# Altium PCB PCB1.PcbDoc
Units mm, origin at the board's own origin, x right, y up, seen from the top; angles counter-clockwise.
Board outline 97.66 x 74.3 mm, 4 copper layers (Top Layer, Layer 1, Layer 2, Bottom Layer), stack 0.603 mm thick; 32 components, 47 nets, 113 pads, 14 vias.
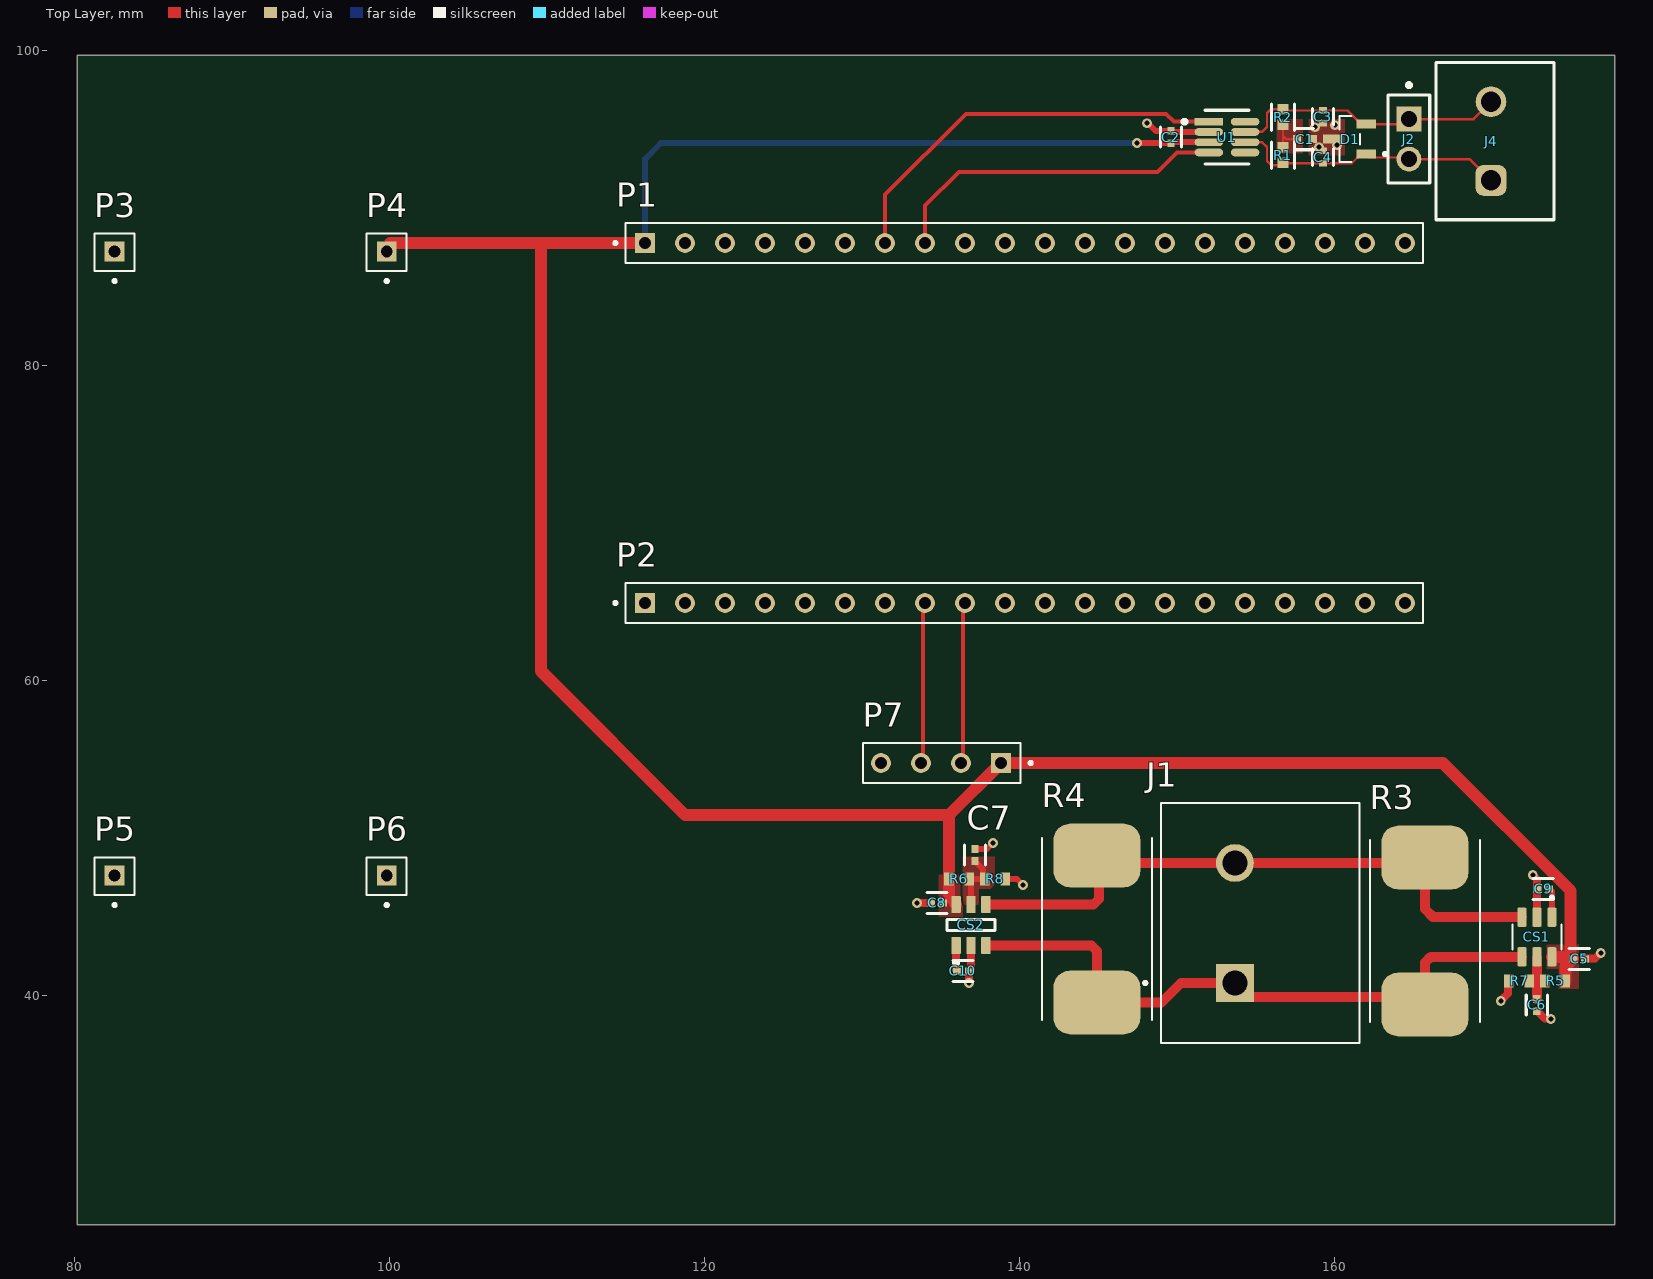
[diagram p0: Top Layer view]
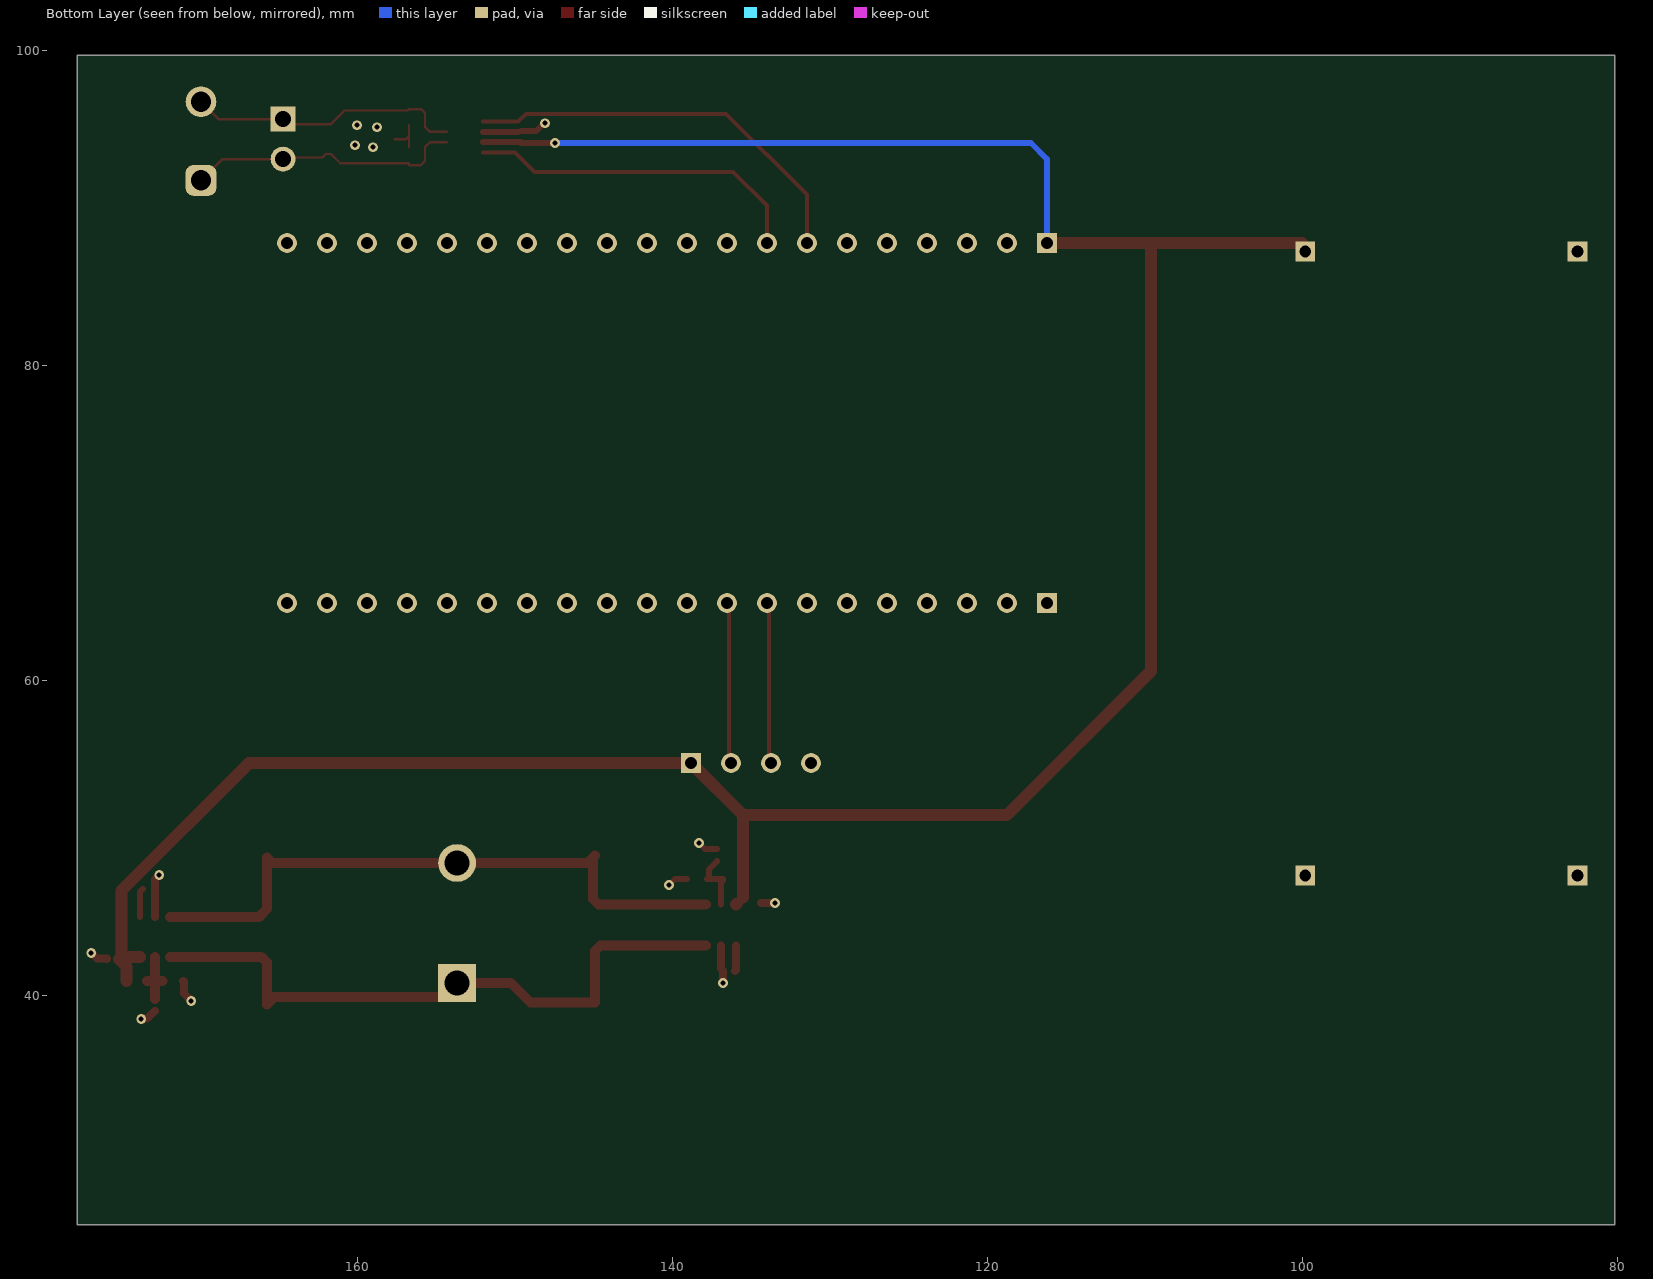
[diagram p1: Bottom Layer view, seen from below]
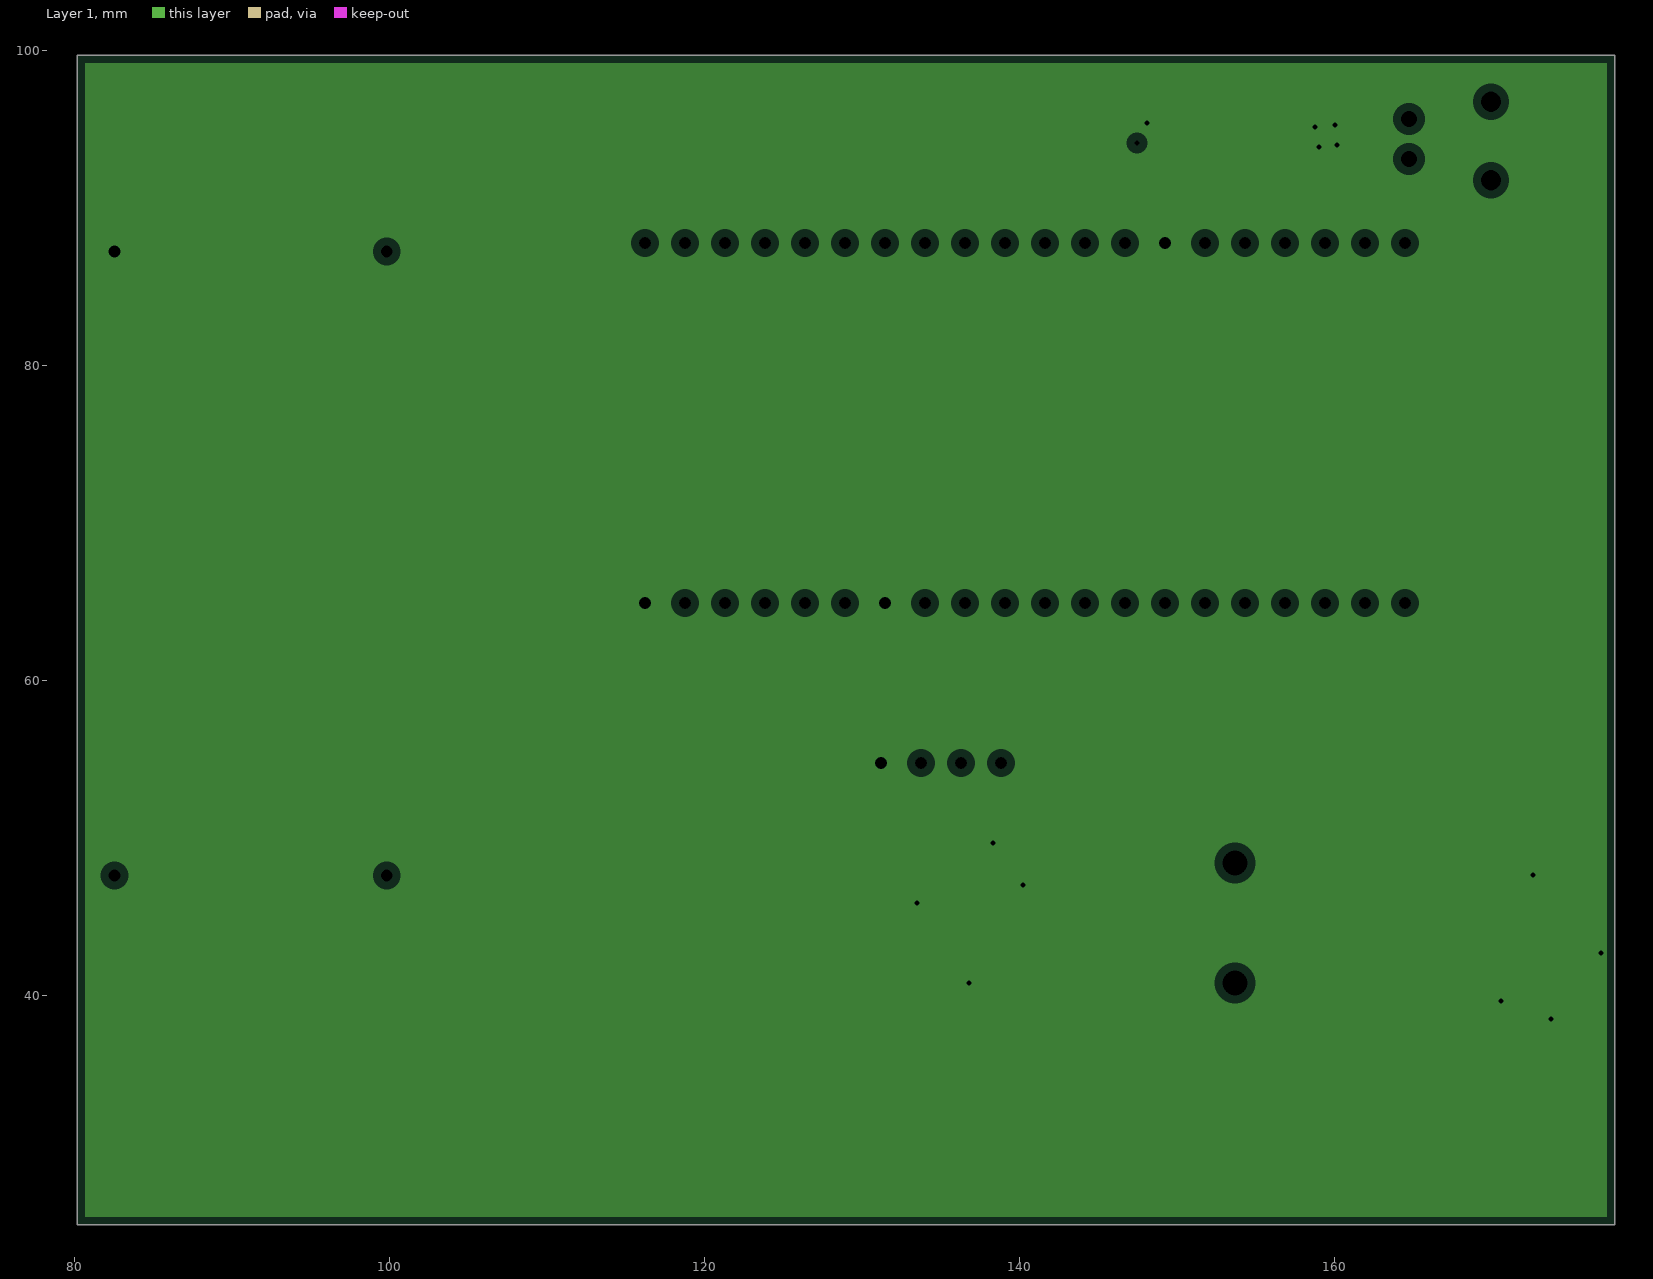
[diagram p2: Layer 1, clearances drawn from the general rule]
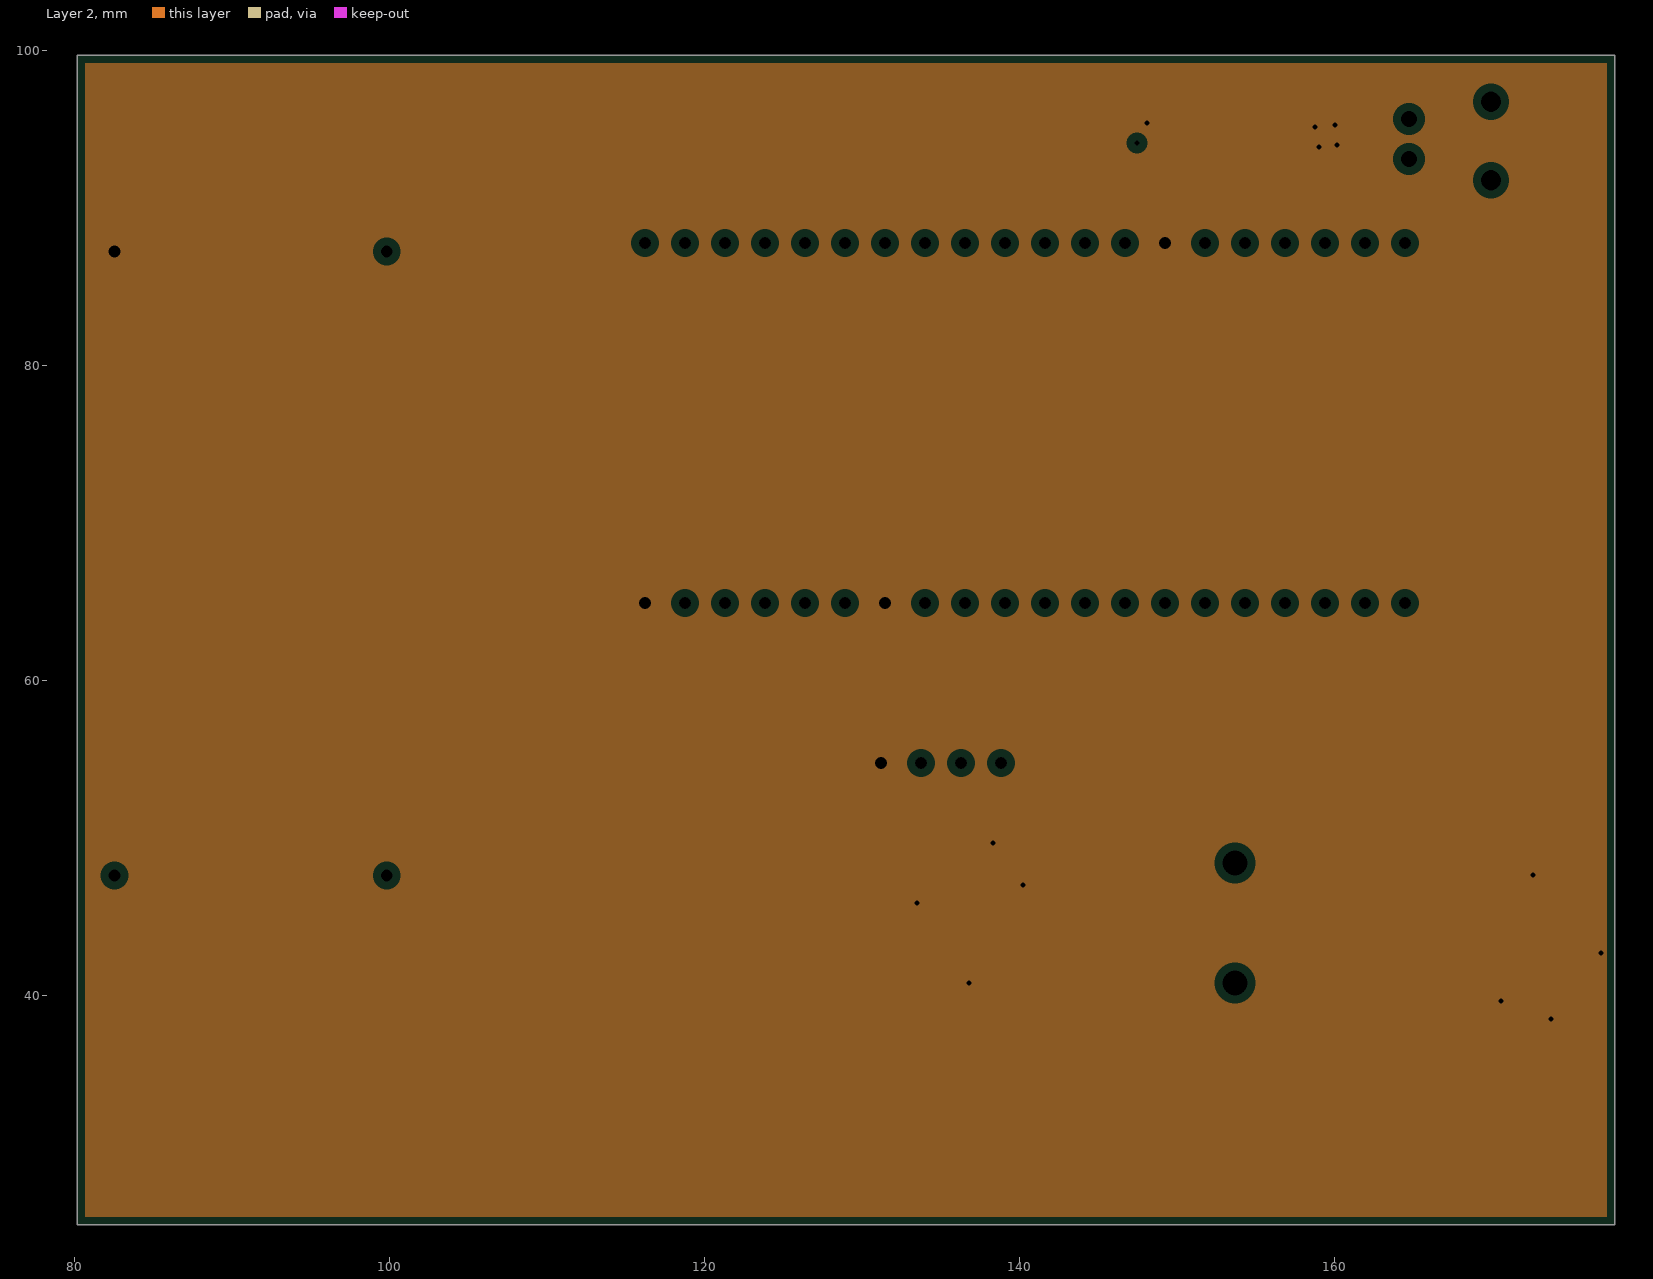
[diagram p3: Layer 2, clearances drawn from the general rule]
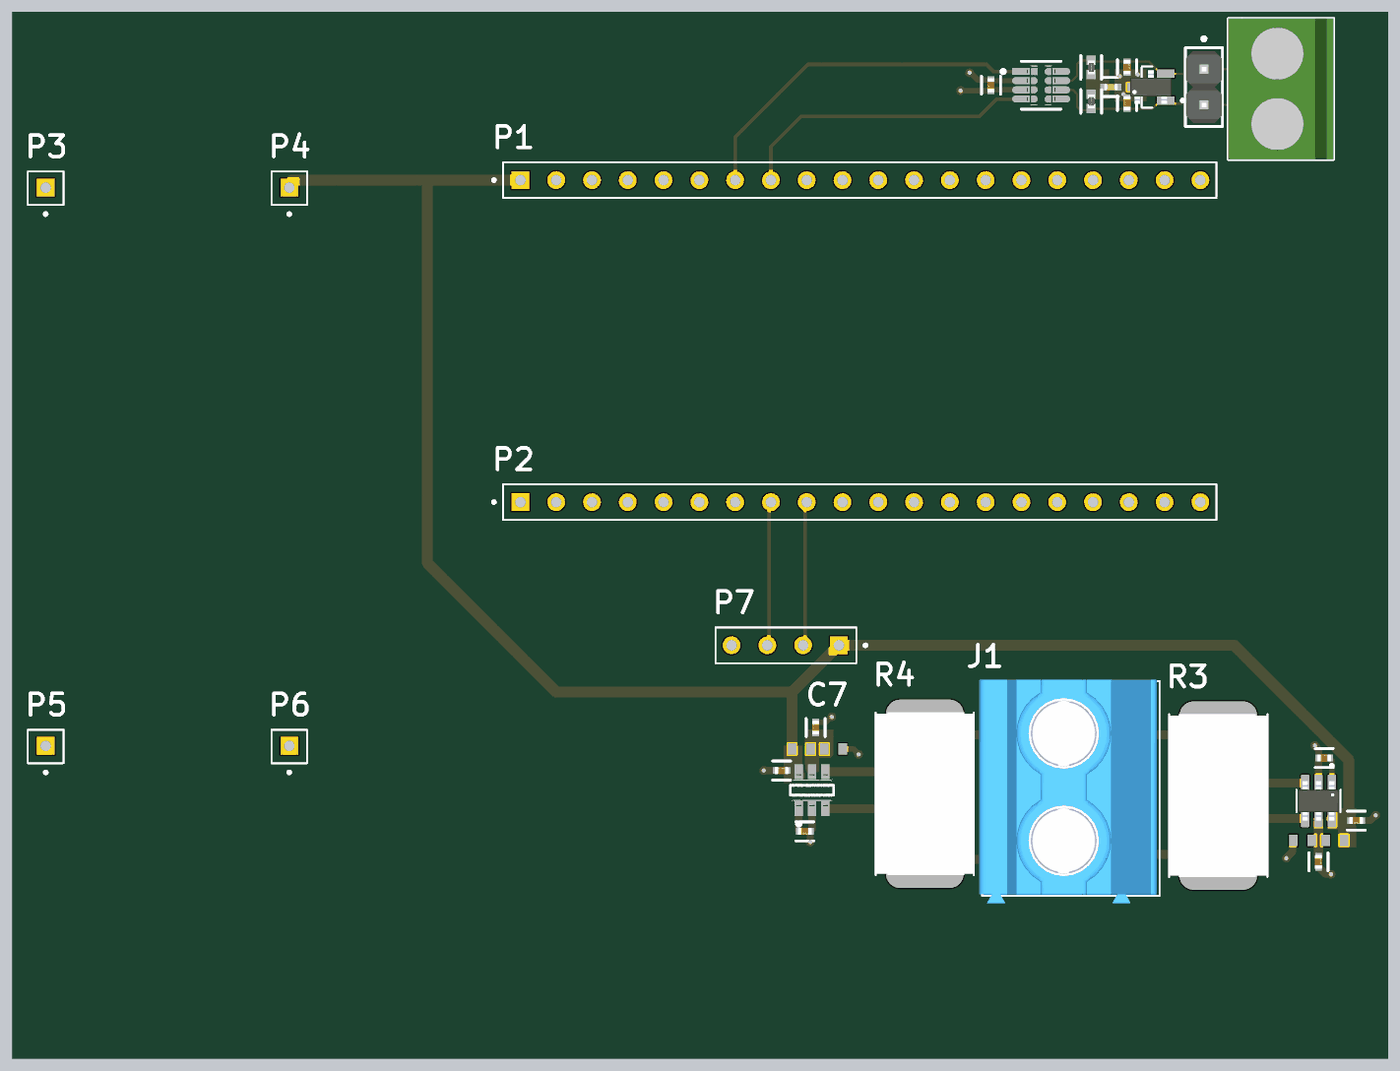
[diagram p4: 3D render of the assembled board from above, using the file's embedded part models]

## Layer stack, top to bottom
Top Solder: solder mask 0.0102, Solder Resist, Dk 3.5
Top Layer: signal copper 0.0356
Dielectric 2: prepreg 0.0711, PP-006, Dk 4.1
Layer 1: plane copper 0.035, net GND
Dielectric 1: dielectric 0.32, FR-4, Dk 4.8
Layer 2: plane copper 0.035, net GND
Dielectric 3: prepreg 0.0711, PP-006, Dk 4.1
Bottom Layer: signal copper 0.0356
Bottom Solder: solder mask 0.0102, Solder Resist, Dk 3.5

## Board outline
80.137,25.4 177.8,25.4 177.8,99.695 80.137,99.695

## Design rules (kind name [scope] priority, off if disabled: settings)
Clearance [All] p1: gap=0.152 ignorepadtopadclearanceinfootprint=FALSE
DiffPairsRouting [All] p1: maxlimit=0.254 minlimit=0.254 mostfreqgap=0.254 toplayer_minwidth=0.127 toplayer_maxwidth=0.381 toplayer_prefwidth=0.381 bottomlayer_minwidth=0.381 bottomlayer_maxwidth=0.381 bottomlayer_prefwidth=0.381 maxuncoupledlength=12.7
PlaneClearance [All] p1: clearance=0.508
PlaneConnect [All] p1: planeconnectstyle=Relief reliefexpansion=0.508 reliefentries=4 reliefconductorwidth=0.254 reliefairgap=0.254
PolygonConnect [All] p1: connectstyle=Direct reliefconductorwidth=0.254 reliefentries=4 polygonreliefangle="90 Angle" airgapwidth=0.254
RoutingVias [All] p1: holewidth=0.305 width=0.61 viastyle="Through Hole" minholewidth=0.305 minwidth=0.61 maxholewidth=0.305 maxwidth=0.61
SolderMaskExpansion [All] p1: expansion=0.102 istentingtop=FALSE
SupplyNets "Schematic Supply Nets_4" [InNet('GND')] p1: voltage=0.000
SupplyNets "Schematic Supply Nets_3" [InNet('3V3')] p2: voltage=0.000
SupplyNets "Schematic Supply Nets_2" [InNet('+5')] p3: voltage=0.000
SupplyNets "Schematic Supply Nets_1" [InNet('-VIN')] p4: voltage=0.000
SupplyNets "Schematic Supply Nets" [InNet('VIN')] p5: voltage=0.000
Width [All] p1: maxlimit=1.27 minlimit=0.152 preferedwidth=0.254
27 further rules are at their usual default settings.

## Classes and differential pairs
differential pair class CAN: CAN
component class Sheet_1: C5 C6 C7 C8 C9 C10 CS1 CS2 J1 P1 P2 P3 P4 P5 P6 P7 R3 R4 R5 R6 R7 R8
component class CAN: C1 C2 C3 C4 D1 J2 J4 R1 R2 U1
differential pair CAN: +CAN_P -CAN_N

## Components (designator, comment, footprint, x,y, rotation, side; value= is the part's Value field where it differs from the comment)
C1 "CC0402KRX7R6BB472" FP-CC0402-MFG 158.115,94.361 r180 top value="4.7 nF"
C2 "CL05B104KP5NNNC" FP-CL17-IPC_C 149.606,94.488 r270 top
C3 "CL05C101JB5NNNC" FP-CL05-MFG 159.258,95.774 r90 top value=100pF
C4 "CL05C101JB5NNNC" FP-CL05-MFG 159.258,93.218 r270 top value=100pF
C5 "CL05A104KA5NNNC" FP-CL278-IPC_C 175.529,42.291 r0 top
C6 "CL05A104KA5NNNC" FP-CL278-IPC_C 172.847,39.37 r90 top
C7 "CL05A104KA5NNNC" FP-CL278-IPC_C 137.16,48.895 r270 top
C8 "CL05A104KA5NNNC" FP-CL278-IPC_C 134.747,45.847 r180 top
C9 "CL05A104KA5NNNC" FP-CL278-IPC_C 173.243,46.736 r180 top
C10 "CL05A104KA5NNNC" FP-CL278-IPC_C 136.398,41.529 r0 top
CS1 "INA181A3IDBVR" SOT95P280X145-6N 172.847,43.688 r270 top
CS2 "INA181A1IDBVR" FP-DBV0006A-MFG 136.906,44.45 r90 top
D1 "ESD2CAN24DBZRQ1" SOT95P237X112-3N 160.948,94.361 r180 top
J1 "TB005-762-02BE" CUI_TB005-762-02BE 153.67,40.767 r90 top
J2 "M20-9990246" FP-M20-9990246-MFG 164.719,94.361 r270 top
J4 "691137710002" 691137710002 170.18,94.234 r90 top
P1 "Header-Female-2.54_1x20" AMPHENOL_76341-322LF 142.875,87.757 r180 top
P2 "Header-Female-2.54_1x20" AMPHENOL_76341-322LF 142.875,64.897 r180 top
P3 "Header-Male-2.54_1x1" PCBCOMPONENT_1 82.517,87.225 r270 top
P4 "Header-Male-2.54_1x1" PCBCOMPONENT_1 99.803,87.225 r270 top
P5 "Header-Male-2.54_1x1" PCBCOMPONENT_1 82.517,47.595 r270 top
P6 "Header-Male-2.54_1x1" PCBCOMPONENT_1 99.803,47.595 r270 top
P7 "Header-Female-2.54_1x4" "4 PIN CONNECTOR MALE" 115.951,50.8 r0 top
R1 "ERJ-2RKF60R4X" FP-ERJ2RK-IPC_A 156.718,93.345 r90 top
R2 "ERJ-2RKF60R4X" FP-ERJ2RK-IPC_A 156.718,95.758 r270 top
R3 "WSR32L000FEA" RESM11569X253N 165.735,44.069 r270 top value=2mR
R4 "WSR32L000FEA" RESM11569X253N 144.907,44.196 r90 top value=2mR
R5 "RC0603FR-1010KL" RESC1608X55X25LL10T15 174.005,40.894 r0 top
R6 "RC0603FR-1010KL" RESC1608X55X25LL10T15 136.144,47.371 r180 top
R7 "RC0603FR-1010KL" RESC1608X55X25LL10T15 171.719,40.894 r0 top
R8 "RC0603FR-1010KL" RESC1608X55X25LL10T15 138.43,47.371 r180 top
U1 "TCAN332GDCNR" FP-DCN0008A-IPC_A 153.162,94.488 r0 top

## Footprints (in the part's own frame and the unit in brackets; to place one, negate y for a bottom-side part, rotate by r counter-clockwise, add the part's x,y. Pads: shape width x height; smd on the part's side, far side on the other; paste and mask are expansions set on the pad)
"4 PIN CONNECTOR MALE" [mm]
  rect 1.258x1.258 / inner round 1.258 / far side rect 1.258x1.258 hole 0.75: 1(22.86,3.937)
  round 1.258 hole 0.75: 2(20.32,3.937) 3(17.78,3.937) 4(15.24,3.937)
  silkscreen extent 14.1,2.67 24.84,5.21
691137710002 [mm] "Horizontal Cable Entry with Pressure Clamp, pitch 5mm, 02p"
  rrect50% 1.95x1.95 hole 1.3: 1(-2.5,0.25)
  round 1.95 hole 1.3: 2(2.5,0.25)
  silkscreen extent -5,-3.75 5,3.75, body extent -5,-3.75 5,3.75, height 11.6
AMPHENOL_76341-322LF [mm]
  rect 1.258x1.258 / inner round 1.258 / far side rect 1.258x1.258 hole 0.75: 01(26.67,0)
  round 1.258 hole 0.75: 02(24.13,0) 03(21.59,0) 04(19.05,0) 05(16.51,0) 06(13.97,0) 07(11.43,0) 08(8.89,0) 09(6.35,0) 10(3.81,0) 11(1.27,0) 12(-1.27,0) 13(-3.81,0) 14(-6.35,0) 15(-8.89,0) 16(-11.43,0) 17(-13.97,0) 18(-16.51,0) 19(-19.05,0) 20(-21.59,0)
  silkscreen extent -22.73,-1.27 28.65,1.27
CUI_TB005-762-02BE [mm]
  rect 2.4x2.4 / inner round 2.4 / far side rect 2.4x2.4 hole 1.6: 1(0,0)
  round 2.4 hole 1.6: 2(7.62,0)
  silkscreen extent -3.81,-7.9 11.43,5.8, body extent -4.32,-7.7 11.52,4.9, height 21.7
FP-CC0402-MFG [mm]
  rect 0.5x0.5 smd paste+0 mask+0: 1(-0.5,0) 2(0.5,0)
  silkscreen extent -0.53,-0.68 0.53,0.67, body extent -0.87,-0.48 0.87,0.48, height 0.25
FP-CL05-MFG [mm]
  rect 0.42x0.525 smd paste+0 mask+0: 1(-0.397,0) 2(0.397,0)
  silkscreen extent -0.53,-0.67 0.53,0.67, body extent -0.71,-0.38 0.71,0.38, height 0.25
FP-CL17-IPC_C [mm]
  rect 0.515x0.472 smd paste+0 mask+0: 1(-0.379,0) 2(0.379,0)
  silkscreen extent -0.64,-0.67 0.64,0.67, body extent -0.74,-0.38 0.74,0.38, height 0.25
FP-CL278-IPC_C [mm]
  rect 0.515x0.472 smd paste+0 mask+0: 1(-0.379,0) 2(0.379,0)
  silkscreen extent -0.64,-0.67 0.64,0.67, body extent -0.74,-0.38 0.74,0.38, height 0.25
FP-DBV0006A-MFG [mm]
  rrect17% 1.1x0.6 smd paste+0 mask+0: 1(-1.3,0.95) 2(-1.3,0) 3(-1.3,-0.95) 4(1.3,-0.95) 5(1.3,0) 6(1.3,0.95)
  silkscreen extent -2.52,-1.53 0.35,1.53, body extent -1.95,-1.78 1.95,1.78, height 0.25
FP-DCN0008A-IPC_A [mm]
  rect 1.805x0.495 smd paste+0 mask+0: 1(-1.15,0.975)
  rrect100% 1.805x0.495 smd paste+0 mask+0: 2(-1.15,0.325) 3(-1.15,-0.325) 4(-1.15,-0.975) 5(1.15,-0.975) 6(1.15,-0.325) 7(1.15,0.325) 8(1.15,0.975)
  silkscreen extent -2.82,-1.7 1.4,1.7, body extent -2.55,-1.95 2.55,1.95, height 0.25
FP-ERJ2RK-IPC_A [mm]
  rect 0.668x0.672 smd paste+0 mask+0: 1(-0.502,0) 2(0.502,0)
  silkscreen extent -0.84,-0.74 0.84,0.74, body extent -1.04,-0.54 1.04,0.54, height 0.25
FP-M20-9990246-MFG [mm]
  rect 1.57x1.57 hole 1.02 paste-2539.97 mask+0: 1(-1.27,0)
  round 1.57 hole 1.02 paste-2539.97 mask+0: 2(1.27,0)
  silkscreen extent -3.55,-1.32 2.79,1.32, body extent -2.89,-1.42 2.89,1.42, height 0.25
PCBCOMPONENT_1 [mm]
  rect 1.258x1.258 / inner round 1.258 / far side rect 1.258x1.258 hole 0.75: 1(0,0)
  silkscreen extent -1.14,-1.27 1.98,1.27
RESC1608X55X25LL10T15 [mm] "Chip Resistor, 2-Leads, Body 1.60x0.80mm, IPC High Density"
  rect 0.6x0.8 smd: 1(-0.65,0) 2(0.65,0)
  body extent -0.85,-0.45 0.85,0.45, height 0.55
RESM11569X253N [mm]
  rrect50% 4.04x5.51 smd: 1(-4.665,0) 2(4.665,0)
  silkscreen extent -5.78,-3.49 5.78,3.49, body extent -5.78,-3.56 5.78,3.42, height 2.42
SOT95P237X112-3N [mm]
  rect 1.24x0.59 smd: 1(-1.055,0.95) 2(-1.055,-0.95) 3(1.055,0)
  silkscreen extent -2.35,-1.46 0.65,1.46, body extent -1.18,-1.46 1.18,1.46, height 1.12
SOT95P280X145-6N [mm]
  rrect25% 1.21x0.58 smd: 1(-1.255,0.95) 2(-1.255,0) 3(-1.255,-0.95) 4(1.255,-0.95) 5(1.255,0) 6(1.255,0.95)
  silkscreen extent -2.6,-1.56 0.8,1.56, body extent -1.4,-1.45 1.4,1.45, height 1.45

## Part data
C1: library part CMP-03422-001343-1, "CC0402 4.7 nF X7R 10.00% 10 V", Capacitance="4.7 nF", Manufacturer=YAGEO, Package=CC0402, Temperature="-55°C to +125°C", Temperature Characteristic=X7R, Temperature Coefficient=30ppm/°C, Temperature Range High=+125°C, Temperature Range Low=-55°C, Tolerance=0.1, Voltage Rating="10 V", Automotive=No, Automotive Grade=NA, Category=Cap, ComponentLink2Description=Datasheet, ComponentLink2URL=http://www.yageo.com/documents/recent/UPY-GP_NP0_16V-to-50V_16.pdf, Device Class L1="Passive Components", Device Class L2=Capacitors, Device Class L3="Ceramic Capacitors", Footprint Url=http://www.yageo.com/exep/pages/download/literatures/UPY-C_GEN_24.pdf, Height=0.55mm, Ipc Land Pattern Name=CAPC10050X50, Lead Free=Yes, Manufacturer Part Number=CC0402KRX7R6BB472, Material=Ceramic, Mouser Description="Cap Ceramic 0.0047uF 10V X7R 10% SMD 0402 125°C Paper T/R", Octopart=https://octopart.com/cc0402krx7r6bb472-yageo-90326733, RoHS=TRUE
C2: library part CMP-13271-001069-1, "Cap Ceramic 100nF 10V X7R ±10% SMD 0402 +125°C Paper T/R", Capacitance=100nF, Case Code (Imperial)=0402, Case Code (Metric)=1005, Dielectric=X7R, Max Operating Temperature=125°C, Min Operating Temperature=-55°C, Package Quantity=1, Tolerance=10%, Voltage Rating=10V, Case/Package=0402, Contact Plating=Tin, Depth=0.5mm, Height=0.5mm, Length=1mm, Mount="Surface Mount", Packaging="Tape and Reel", Radiation Hardening=No, Thickness=0.022inch, Width=0.02inch
C3 C4: library part CMP-13271-000010-1, "CAP CER 100PF 50V C0G/NP0 0402", Capacitance=100pF, Manufacturer=Samsung, Package=CL05, Temperature="-55°C to +125°C", Temperature Characteristic=C0G, Temperature Coefficient=30ppm/°C, Temperature Range High=+125°C, Temperature Range Low=-55°C, Tolerance=5%, Voltage Rating=50V, Automotive=No, Category=Cap, ComponentLink2Description=Datasheet, ComponentLink2URL=http://www.samsungsem.com/global/front/downloadcms.do?path=%2F%2Fglobal%2F%2Fsupport%2F%2Fproduct-search%2F%2Fmlcc%2F%2F__icsFiles%2F%2Fafieldfile%2F%2F2019%2F%2F06%2F%2F18&fileName=CL05C101JB5NNNC-19.pdf, Device Class L1="Passive Components", Device Class L2=Capacitors, Device Class L3="Ceramic Capacitors", Digikey Description="CAP CER 100PF 50V C0G/NP0 0402", Height=0.55mm, Ipc Land Pattern Name=CAPC10050X50, Lead Free=Yes, Manufacturer Part Number=CL05C101JB5NNNC, Material=Ceramic, Octopart=https://octopart.com/cl05c101jb5nnnc-samsung-9299367, RoHS=TRUE
C5 C6 C7 C8 C9 C10: library part CMP-13271-000728-1, "Cap Ceramic 100nF 25V X5R ±10% SMD 0402 +85°C Paper T/R", Capacitance=100nF, Case Code (Imperial)=0402, Case Code (Metric)=1005, Dielectric=X5R, Max Operating Temperature=85°C, Min Operating Temperature=-55°C, Package Quantity=1, Tolerance=10%, Voltage=25V, Case/Package=0402, Depth=0.5mm, Height=0.5mm, Lead Free="Lead Free", Length=1mm, Mount="Surface Mount", Packaging="Tape and Reel", Radiation Hardening=No, Thickness=0.022inch, Voltage Rating=25V, Voltage Rating (DC)=25V, Width=0.02inch
CS1: "Operational Amplifier, 1 Func, 500uV Offset-Max, PDSO6", Average Bias Current-Max (IIB)=75uA, Case/Package=SOP, Input Offset Voltage-Max=500uV, Manufacturer="Texas Instruments", Max Operating Temperature=125°C, Min Operating Temperature=-40°C, Nominal Supply Voltage=5V, Package Body Material=Plastic, Package Shape=Rectangular, Package Style="SMALL OUTLINEMeter", Peak Reflow Temperature (Cel)=260°C, Supplier Part Number=296-47658-1-ND, Supply Voltage Limit-Max=5.5V, Temperature Grade=AUTOMOTIVE, Amplifier Type="OPERATIONAL AMPLIFIER", Category="Amplifiers - Op Amps, Buffer, Instrumentation", Channels=1, Common-mode Reject Ratio-Nom=100dB, ComponentLink1Description=https://www.ti.com:443/lit/ds/symlink/ina181.pdf?src-supplier=IHS+Markit, ComponentLink1URL=https://www.ti.com:443/lit/ds/symlink/ina181.pdf?src-supplier=IHS+Markit, ComponentLink2Description=http://www.ti.com/lit/ds/symlink/ina181.pdf?src-supplier=Digikey, ComponentLink2URL=http://www.ti.com/lit/ds/symlink/ina181.pdf?src-supplier=Digikey, JESD-30 Code=R-PDSO-G6, JESD-609 Code=e3, Manufacturer Part Number=INA181A3IDBVR, Moisture Sensitivity Level=1, Pins=6, Pricing="1=0.43, 10=0.297, 25=0.2652, 100=0.2296, 250=0.21268, 500=0.20246, 1000=0.19404 (USD)", Reach SVHC Compliant=Yes, RoHS=Yes, RoHS Compliant=Yes, Slew Rate=2V/µs, Stock=8886, Supplier=Digikey, Surface Mount=Yes, Terminal Finish=Tin, Terminal Form="Gull Wing", Terminal Position=DUAL, Unity Gain BW-Nom=350kHz
CS2: library part CMP-04895-000055-1, "IC CURR SENSE 1 CIRCUIT SOT23-6", Ambient Temperature Range High=+125°C, Ambient Temperature Range Low=-40°C, Input Bias Current=75uA, Input Offset Voltage=0.1mV, Manufacturer="Texas Instruments", Max Junction Temp=+150°C, Max Supply Voltage=5.5V, Min Supply Voltage=2.7V, Nominal Supply Current=195uA, Output Current Per Channel=8mA, Package=DBV0006A, Temperature="-40°C to +125°C", Voltage Gain=0.02V/mV, Automotive=No, Bandwidth=350kHz, Category=IC, ComponentLink2Description=Datasheet, ComponentLink2URL=http://www.ti.com/lit/ds/symlink/ina181.pdf, Device Class L1="Integrated Circuits (ICs)", Device Class L2="Linear ICs", Device Class L3=Instrumentation, Digikey Description="IC CURR SENSE 1 CIRCUIT SOT23-6", Height=1.45mm, Lead Free=Yes, Manufacturer Part Number=INA181A1IDBVR, Mouser Description="26V bi-directional current sense amplifier for cost-sensitive systems 6-SOT-23 -40 to 125", Number of Channels=1, Octopart=https://octopart.com/ina181a1idbvr-texas+instruments-81856289, RoHS=TRUE, Standoff Height=0mm, Temperature Range High=+125°C, Temperature Range Low=-40°C
D1: "Automotive, dual, 3-pF, ±24-V, ±30-kV ESD protection diode for CAN and in-vehicle networks 3-SOT-23 -55 to 150", Manufacturer="Texas Instruments", Supplier Part Number=296-ESD2CAN24DBZRQ1CT-ND, Category="Integrated Circuits (ICs)", Manufacturer Part Number=ESD2CAN24DBZRQ1, Pricing="1=0.22, 10=0.149, 25=0.1316, 100=0.1125, 250=0.10328, 500=0.09774, 1000=0.09319 (USD)", RoHS=No, Stock=12405, Supplier=Digikey
J1: "Barrier Strip Terminal Block", Manufacturer="Same Sky", Supplier Part Number=102-6189-ND, Category="Terminal Blocks", ComponentLink1Description=https://www.cuidevices.com/product/resource/digikeypdf/tb005-762.pdf?src-supplier=Digikey, ComponentLink1URL=https://www.cuidevices.com/product/resource/digikeypdf/tb005-762.pdf?src-supplier=Digikey, ComponentLink2Description=https://datasheet.octopart.com/TB005-762-02BE-Same-Sky-datasheet-182050252.pdf?src-supplier=Future+Electronics, ComponentLink2URL=https://datasheet.octopart.com/TB005-762-02BE-Same-Sky-datasheet-182050252.pdf?src-supplier=Future+Electronics, ComponentLink3Description=https://datasheet.octopart.com/TB005-762-02BE-CUI-Devices-datasheet-142371921.pdf?src-supplier=Future+Electronics, ComponentLink3URL=https://datasheet.octopart.com/TB005-762-02BE-CUI-Devices-datasheet-142371921.pdf?src-supplier=Future+Electronics, ComponentLink4Description=https://datasheet.octopart.com/TB005-762-02BE-Same-Sky-datasheet-182881445.pdf?src-supplier=Electro+Sonic, ComponentLink4URL=https://datasheet.octopart.com/TB005-762-02BE-Same-Sky-datasheet-182881445.pdf?src-supplier=Electro+Sonic, ComponentLink5Description=https://datasheet.octopart.com/TB005-762-02BE-Same-Sky-datasheet-189105715.pdf?src-supplier=Master+Electronics, ComponentLink5URL=https://datasheet.octopart.com/TB005-762-02BE-Same-Sky-datasheet-189105715.pdf?src-supplier=Master+Electronics, Manufacturer Part Number=TB005-762-02BE, Pricing="1=0.78, 10=0.574, 25=0.5, 50=0.4504, 100=0.4073, 250=0.36028, 600=0.3253, 1200=0.30358, 5400=0.27068 (USD)", RoHS=Yes, Stock=4809, Supplier=Digikey
J2: library part CMP-15831-000009-1, "CONN HEADER VERT 2POS 2.54MM", Current Rating=3A, Manufacturer=Harwin, Temperature="-40°C to +105°C", Temperature Range High=+105°C, Temperature Range Low=-40°C, Automotive=No, Category=Conn, ComponentLink2Description=Datasheet, ComponentLink2URL=https://cdn.harwin.com/pdfs/M20-999.pdf, Conn Gender=Male, Conn Orientation=Vertical, Contact Material=Tin,Nickel, Device Class L1=Connectors, Device Class L2="Headers and Wire Housings", Device Class L3=unset, Digikey Description="CONN HEADER VERT 2POS 2.54MM", Height=8.99mm, Lead Free=Yes, Manufacturer Part Number=M20-9990246, Mouser Description="2.54mm (0.1\") Pitch SIL Vertical PC Tail Pin Header, 6.1mm mating pin height, tin, 2 contacts", Number of Contacts=2, Number of Rows=1, Octopart=https://octopart.com/m20-9990246-harwin-2590635, Package=M20-9990246, Pitch=2.54mm, RoHS=TRUE
J4: library part CMP-1502-03324-2, Current Rating=16A, Max Operating Temperature=120°C, Min Operating Temperature=-30°C, Voltage Rating=300V, Contact Material="Nickel, Tin", Height=11.6mm, Lead Pitch=5mm, NexarPartId=78871135, Number of Contacts=2, Number of Pins=2, Number of Rows=1, Packaging=Box, RoHS=Non-Compliant
P1 P2: JLCPCB Part Class="Extended Part", Manufacturer=BOOMELE(博穆精密), Manufacturer Part=2.54-1*20P母, spicePre=P, spiceSymbolName=Header-Female-2.54_1x20, Supplier=LCSC, Supplier Part=C50984
P3 P4 P5 P6: JLCPCB Part Class="Extended Part", Manufacturer=BOOMELE(博穆精密), Manufacturer Part=2.54-1*1P针, spicePre=P, spiceSymbolName=Header-Male-2.54_1x1, Supplier=LCSC, Supplier Part=C81276
P7: Manufacturer=ReliaPro, Manufacturer Part=Header-Female-2.54_1x4, spicePre=P, spiceSymbolName=Header-Female-2.54_1x4, Supplier=LCSC, Supplier Part=C124413
R1 R2: library part CMP-2002-01013-2, "RES SMD 60.4 OHM 1% 1/10W 0402", Case Code (Imperial)=0402, Case Code (Metric)=1005, Max Operating Temperature=155°C, Max Power Dissipation=100mW, Min Operating Temperature=-55°C, Package Quantity=1, Resistance=60.4R, Resistance Tolerance=1%, Resistor Type="Thick Film", Temperature Coefficient=100ppm/°C, Voltage Rating=50V, Case/Package=0402, Construction=Rectangular, Contact Plating=Tin, Depth=0.5mm, Features="Automotive AEC-Q200", Height=0.016inch, Lead Free="Contains Lead", Length=1mm, Military Standard=Not, Mount="Surface Mount", Number of Terminations=2, Packaging="Tape and Reel", Power Rating=100mW, REACH SVHC="No SVHC", RoHS Compliant=Yes, Series=ERJ, Termination=SMD/SMT, Tolerance=1%, Voltage Rating (DC)=50V, Width=0.02inch
R3 R4: "Fixed Resistor, Metal Strip, 3W, 0.002ohm, 0.077V, 1% +/-Tol, 600ppm/Cel, Surface Mount, 4527", Case/Package=4527, Manufacturer="Vishay Dale", Max Operating Temperature=275°C, Min Operating Temperature=-65°C, Package Height=2.41mm, Package Length=11.56mm, Package Shape=Rectangular, Package Width=6.98mm, Power=3W, Rated Temperature=70°C, Resistor Type="FIXED RESISTOR", Supplier Part Number=WSRB-.002CT-ND, Temperature Coefficient (ppm/Cel)=-600,600, Tolerance=1%, Category="Chip SMD Resistors", ComponentLink1Description=https://datasheet.ciiva.com:443/pdfs/VipMasterIC/IC/VISH/VISH-S-A0007103483/VISH-S-A0007103483-1.pdf?src-supplier=IHS+Markit, ComponentLink1URL=https://datasheet.ciiva.com:443/pdfs/VipMasterIC/IC/VISH/VISH-S-A0007103483/VISH-S-A0007103483-1.pdf?src-supplier=IHS+Markit, ComponentLink2Description=https://datasheet.ciiva.com/11812/0900766b80d81e5e-11812948.pdf?src-supplier=Rs, ComponentLink2URL=https://datasheet.ciiva.com/11812/0900766b80d81e5e-11812948.pdf?src-supplier=Rs, ComponentLink3Description=https://datasheet.ciiva.com/2484/wsr-2484757.pdf?src-supplier=Digikey, ComponentLink3URL=https://datasheet.ciiva.com/2484/wsr-2484757.pdf?src-supplier=Digikey, ComponentLink4Description=https://datasheet.ciiva.com/2484/wsr-2484758.pdf?src-supplier=Digikey, ComponentLink4URL=https://datasheet.ciiva.com/2484/wsr-2484758.pdf?src-supplier=Digikey, ComponentLink5Description=https://datasheet.ciiva.com/2484/wsr-2484759.pdf?src-supplier=Digikey, ComponentLink5URL=https://datasheet.ciiva.com/2484/wsr-2484759.pdf?src-supplier=Digikey, ComponentLink6Description=https://datasheet.ciiva.com/16375/wsr-16375639.pdf?src-supplier=Future+Electronics, ComponentLink6URL=https://datasheet.ciiva.com/16375/wsr-16375639.pdf?src-supplier=Future+Electronics, Construction=Chip, JESD-609 Code=e2, Manufacturer Part Number=WSR32L000FEA, Mounting Technology="Surface Mount", Packaging="Tape and Reel", Pins=2, Pricing="1=1.54, 10=1.022, 25=0.906, 50=0.8386, 100=0.7852, 250=0.73096, 500=0.69258 (USD)", Reach SVHC Compliant=Yes, Reference Standard=AEC-Q200, RoHS=Yes, RoHS Compliant=Yes, Stock=1901, Supplier=Digikey, Technology="METAL STRIP", Terminal Finish=Tin, Termination=Wraparound
R5 R6 R7 R8: library part CMP-2000-06948-1, "Chip Resistor, 10 kOhm, +/- 1%, 0.1 W, -55 to 155 degC, 0603 (1608 Metric), RoHS, Tape and Reel", Case Style=Molded, Manufacturer=Yageo, Operating Temp Range=-55Cto155C, Package / Case=0603, Package Description="2-Pin Surface Mount Device, Body 1.6 x 0.8 mm", Power Rating(s)=1/10W, Resistance=10kohm, Temperature Coefficient=±100, Tolerance (+ or -)=1%, Construction=Rectangular, Datasheet URL=http://www.yageo.com/documents/recent/PYu-RC_Group_51_RoHS_L_7.pdf, Datasheet Version="Rev. 7, 05/2017", Failure Rate=NotRequired, Manufacturer URL=http://www.yageo.com/, Military Standard=NotRequired, Mounting Technology=SurfaceMount, Package Reference=0603, Packaging=TapeandReel, Product Depth (mm)=0.8mm, Product Height (mm)=0.45mm, Product Length (mm)=1.6mm, Termination Style=NotRequired, Type=ThickFilm
U1: library part CMP-04872-000119-1, "IC TRANSCEIVER 1/1 SOT23-8", Case/Package=SOT-23-8, Max Operating Temperature=125°C, Min Operating Temperature=-40°C, Data Rate=5Mbps, Lead Free="Lead Free", Mount="Surface Mount", Packaging="Tape and Reel", Receiver Hysteresis=120mV, RoHS Compliant=Yes

## Via types
v1: diameter 0.61, hole 0.305, Top Layer to Bottom Layer, tented both sides, 14 vias

## Nets (pads, with @x,y where several pads share a name; then routed paths per layer and width w, separated by ;. In a path a pad name is that pad's centre, name@x,y a point inside that pad or via, vN(x,y) a via of type N, cw(c..) or ccw(c..) an arc to the next point about the centre after c; other vN are vias at no path point)
3V3: C2.2 C5.1 C8.1 CS1.6 CS2.6 P1.01 P4.1 P7.1 R5.2 R6.2 U1.3 | length 171.2
  Top Layer w0.381: v1(147.447,94.109) 149.598,94.109 149.652,94.163 U1.3
  Top Layer w0.762: P4.1@99.796,87.218 P4.1 ; P4.1@100.007,87.764 116.198,87.764 P1.01 ; 109.601,87.757 109.601,60.579 118.76,51.42 135.494,51.42 ; 135.494,46.194 R6.2 135.494,51.42 ; CS2.6@135.905,45.801 CS2.6 ; CS1.6 174.987,42.433 174.987,46.619 166.869,54.737 P7.1 135.494,51.42 ; R5.2 174.655,41.817 C5.1@175.129,42.291
  Bottom Layer w0.381: P1.01 116.205,93.091 117.223,94.109 v1(147.447,94.109)
+5: P1.19
-VIN: P5.1
CAN_N: C4.2 D1.1 J2.2 J4.1 R1.1 U1.6 | length 17.7
  Top Layer w0.152: U1.6 155.392,94.163 155.702,93.853 155.702,92.964 155.956,92.71 156.712,92.71 R1.1@156.718,92.716 ; R1.1 156.74,92.821 C4.2 161.087,92.821 161.678,93.411 D1.1 162.222,93.192 164.618,93.192 J2.2 168.573,93.091 J4.1
CAN_P: C3.2 D1.2 J2.1 J4.2 R2.1 U1.7 | length 17.7
  Top Layer w0.152: U1.7 155.392,94.813 155.702,95.123 155.702,96.012 155.956,96.266 156.712,96.266 R2.1 156.806,96.172 C3.2 160.817,96.172 161.678,95.311 D1.2 164.399,95.311 J2.1 168.827,95.631 J4.2
ENB: P1.02
GND: C1.1 C2.1 C3.1 C4.1 C5.2 C6.1 C7.1 C8.2 C9.2 C10.2 CS1.2 CS2.2 D1.3 P1.14 P2.01 P2.07 P3.1 P7.4 R7.1 R8.1 U1.2 | length 16.4
  Top Layer w0.381: C7.1 137.92,49.274 v1(138.303,49.657) ; R8.1 139.827,47.371 v1(140.208,46.99) ; v1(148.082,95.377) 148.144,95.377 148.654,94.867 C2.1 ; C2.1@149.772,94.813 U1.2
  Top Layer w0.508: v1(133.477,45.847) C8.2 ; v1(136.779,40.767) v1(136.779,40.767) 136.778,41.528 C10.2 136.777,41.543 136.906,41.673 CS2.2 ; v1(170.561,39.624) 170.561,39.651 171.023,40.113 171.023,40.848 R7.1 ; v1(172.593,47.625) 172.593,47.598 172.861,47.33 C9.2@172.861,46.754 ; C6.1 172.861,38.991 173.352,38.5 173.717,38.5 v1(173.736,38.481) ; CS1.2 172.847,46.704 172.864,46.722 C9.2 ; C5.2 175.908,42.305 175.911,42.309 176.52,42.309 176.884,42.672 v1(176.911,42.672)
  other v1: 159.004,93.853 160.147,93.98 158.75,95.123 160.02,95.25
GPIO0: P2.14
GPIO1: P2.04
GPIO2: P2.15
GPIO3: P2.05
GPIO4: P2.13
GPIO5: P2.10
GPIO6: P2.19
GPIO7: P2.18
GPIO8: P2.17
GPIO9: P1.16
GPIO10: P1.17
GPIO11: P1.18
GPIO12: P1.13
GPIO13: P1.15
GPIO14: P1.12
GPIO15: P2.16
GPIO16: P2.12
GPIO17: P2.11
GPIO18: P2.09 P7.2 | length 10.3
  Top Layer w0.254: P7.2 136.398,54.864 136.398,64.77 P2.09
GPIO19: P2.08 P7.3 | length 10.3
  Top Layer w0.254: P7.3 133.858,54.864 133.858,64.77 P2.08
GPIO21: P2.06
GPIO22: P2.03
GPIO23: P2.02
GPIO25: P1.09
GPIO26: P1.10
GPIO27: P1.11
GPIO32: P1.07 U1.1 | length 26
  Top Layer w0.254: P1.07 131.445,90.83 136.576,95.961 149.289,95.961 149.787,95.463 U1.1
GPIO33: P1.08 U1.4 | length 21.8
  Top Layer w0.254: P1.08 133.985,90.127 136.136,92.278 148.754,92.278 149.988,93.513 U1.4
GPIO34: P1.05
GPIO35: P1.06
GPIO36: P1.03
GPIO39: P1.04
IN+: CS1.3 CS2.4 J1.2 R3.1 R4.2 | length 41
  Top Layer w0.635: CS2.4 144.683,45.75 145.034,46.101 145.034,48.734 R4.2 145.381,48.387 J1.2 165.388,48.387 R3.1 165.735,45.466 166.258,44.943 CS1.3
IN-: CS1.4 CS2.3 J1.1 R3.2 R4.1 | length 41.3
  Top Layer w0.635: CS2.3 144.556,43.15 144.907,42.799 R4.1 149.005,39.531 150.241,40.767 J1.1 154.553,39.884 165.255,39.884 R3.2 165.735,42.061 166.107,42.433 CS1.4
NetC1_2: C1.2 R1.2 R2.2 | length 2.4
  Top Layer w0.152: R1.2 156.718,94.551 ; R2.2 156.718,94.551 ; C1.2 156.909,94.361 156.718,94.551
NetC6_2: C6.2 CS1.5 R5.1 R7.2 | length 3.7
  Top Layer w0.635: R7.2 172.862,40.894 ; C6.2 172.847,40.909 ; CS1.5 172.847,40.909 ; R5.1 172.862,40.894 ; 172.847,40.909 172.862,40.894
NetC7_2: C7.2 CS2.5 R6.1 R8.2 | length 4
  Top Layer w0.381: R6.1@136.794,47.271 136.906,47.159 CS2.5 ; R6.1 R8.2 137.671,47.48 137.671,47.984 137.16,48.495 C7.2
NetC9_1: C9.1 CS1.1 | length 1.9
  Top Layer w0.381: C9.1 173.643,46.736 173.797,46.582 CS1.1
NetC10_1: C10.1 CS2.1 | length 1.6
  Top Layer w0.508: CS2.1 135.956,41.607 136.019,41.543 C10.1
VIN: P6.1
pads on no net: P1.20 P2.20 U1.5 U1.8

## Polygon pours and split planes (outlines as drawn)
3V3 on Top Layer "NONET_L-01_P-001" (solid, pour order 4): 134.874,47.625 134.874,44.958 136.398,44.958 136.398,47.625
3V3 on Top Layer "NONET_L-01_P-001" (solid, pour order 3): 173.482,43.18 173.482,41.656 174.244,41.656 174.244,40.386 175.514,40.386 175.514,43.18
NetC7_2 on Top Layer "NONET_L-01_P-001" (solid, pour order 2): 136.398,48.768 136.398,45.72 137.414,45.72 137.414,46.736 138.176,46.736 138.43,46.99 138.43,48.768
NetC1_2 on Top Layer "NONET_L-01_P-001" (solid, pour order 0): 156.337,95.631 156.337,93.472 157.988,93.472 157.988,95.631
GND on Top Layer "NONET_L-01_P-001" (solid, pour order 1): 158.369,95.631 158.369,93.345 160.655,93.345 160.655,95.631
GND on Layer 1 (split plane): 177.29,25.91 80.647,25.91 80.647,99.185 177.29,99.185
GND on Layer 2 (split plane): 177.29,25.91 80.647,25.91 80.647,99.185 177.29,99.185